# EAGLE board BeagleBone_Black_Rev C EAGLE PCB (EAGLE 7.2.0), part 1 of 5
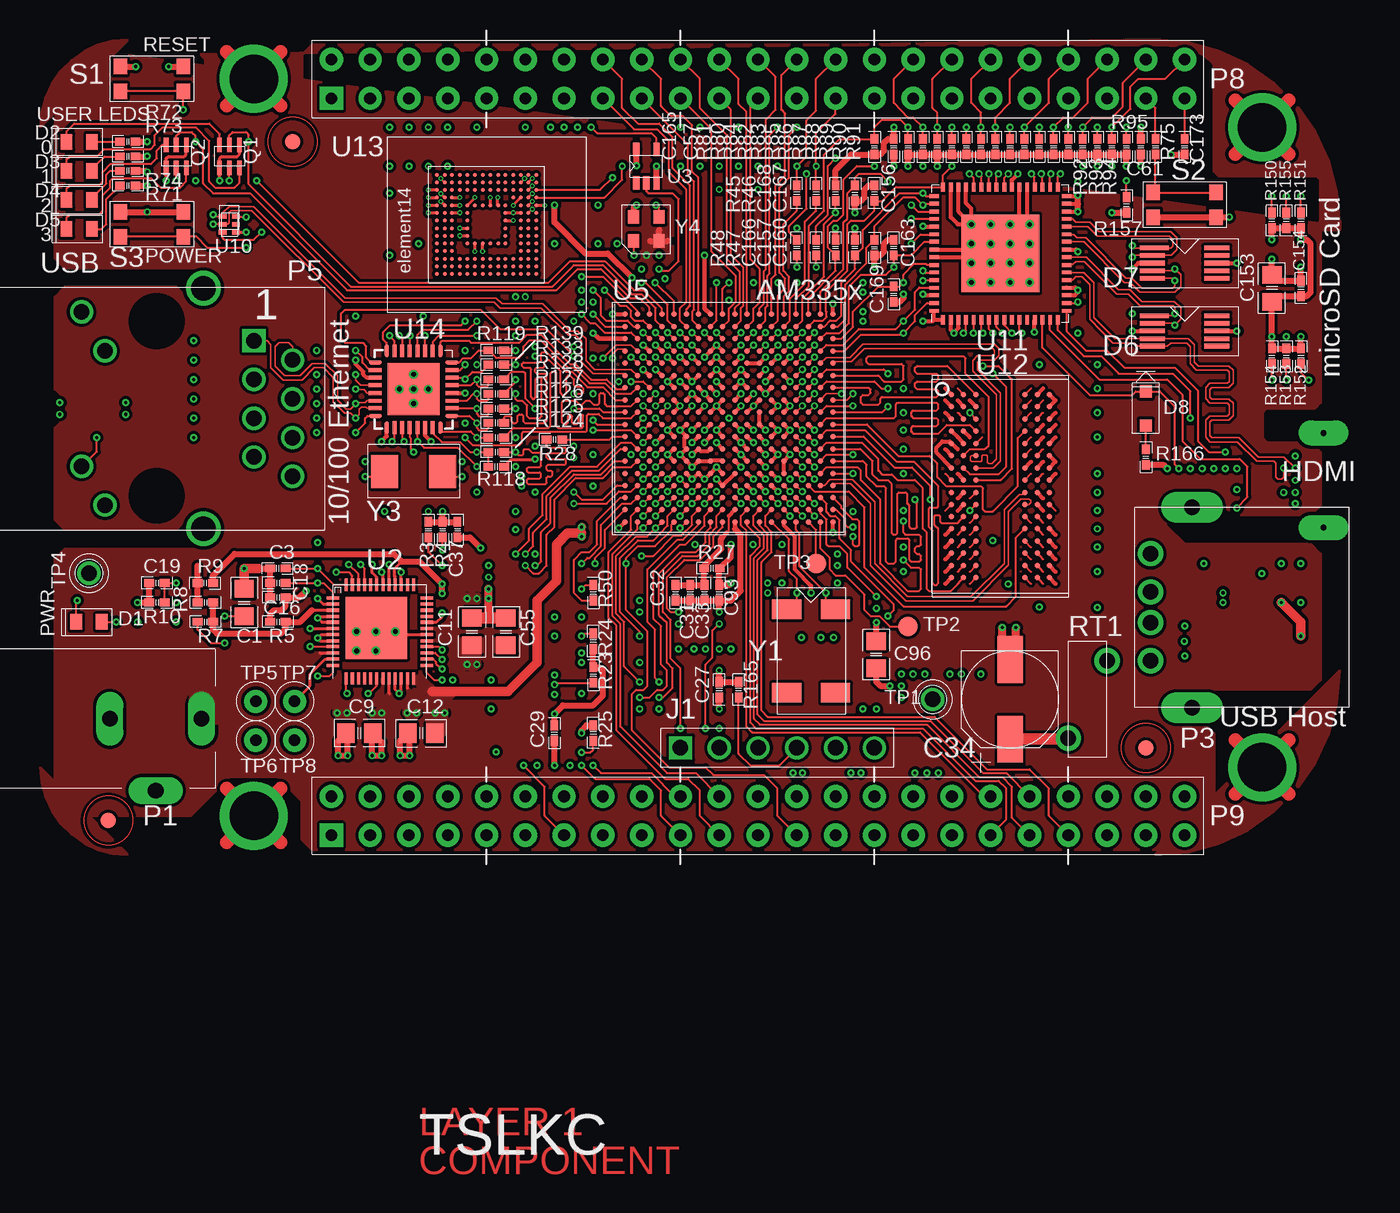
[diagram p0: board, top side]
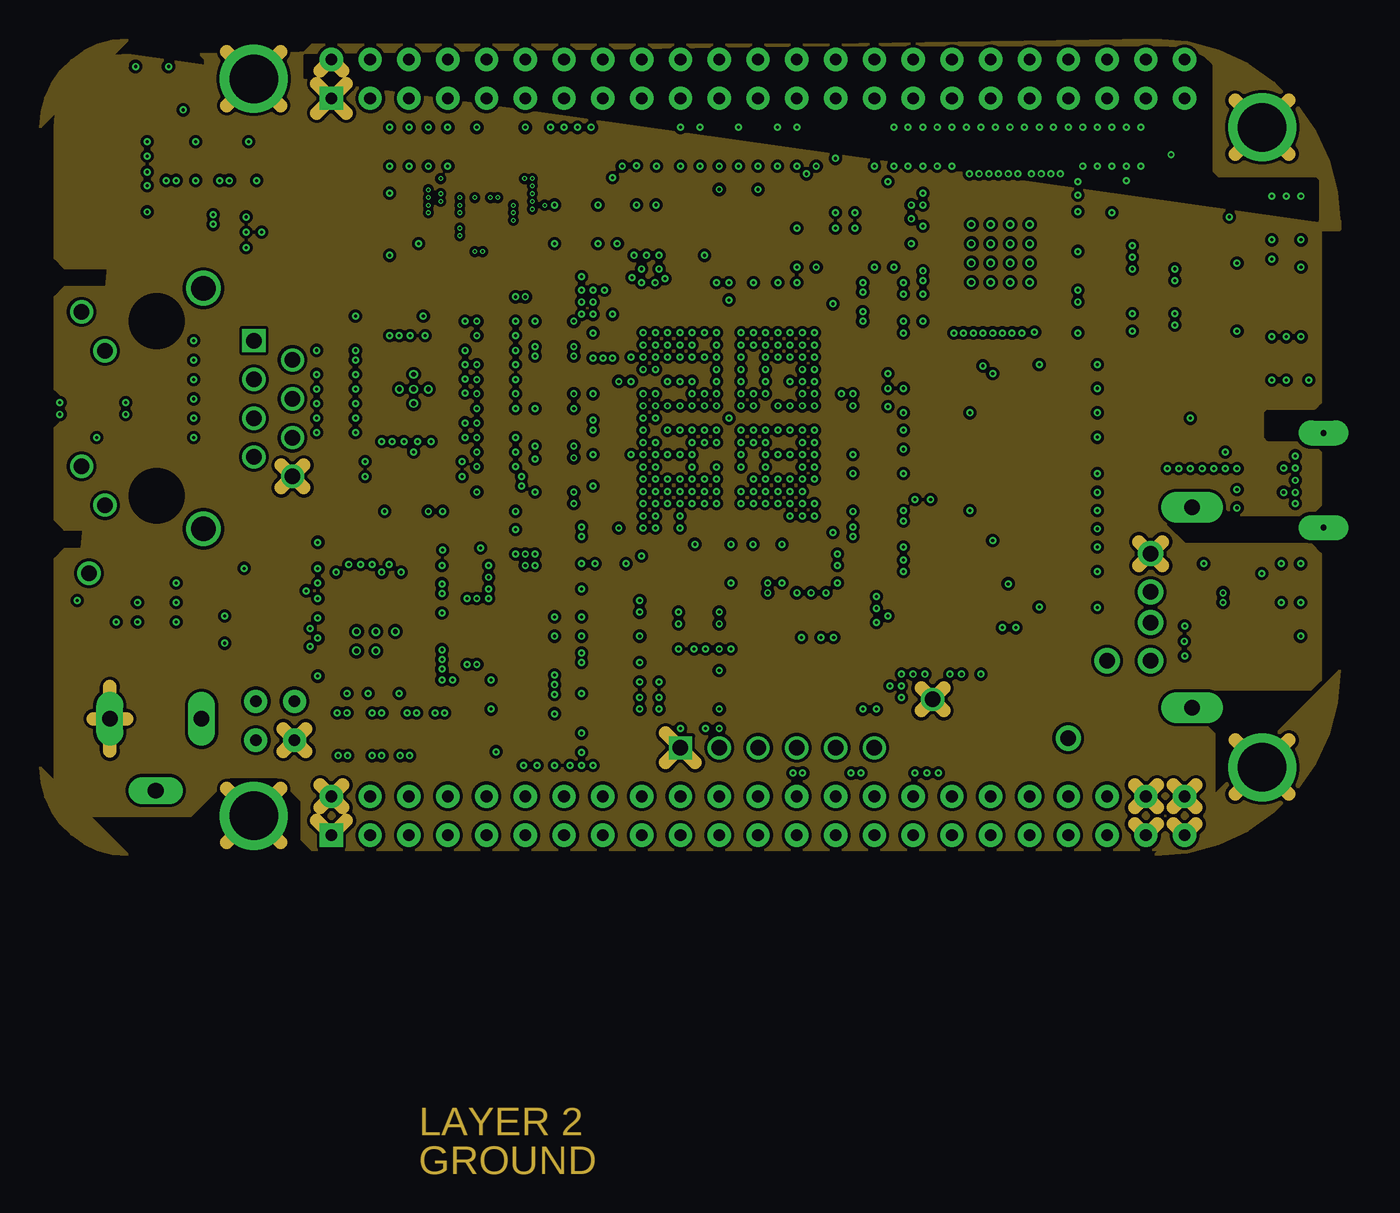
[diagram p1: board, inner layer Route2]
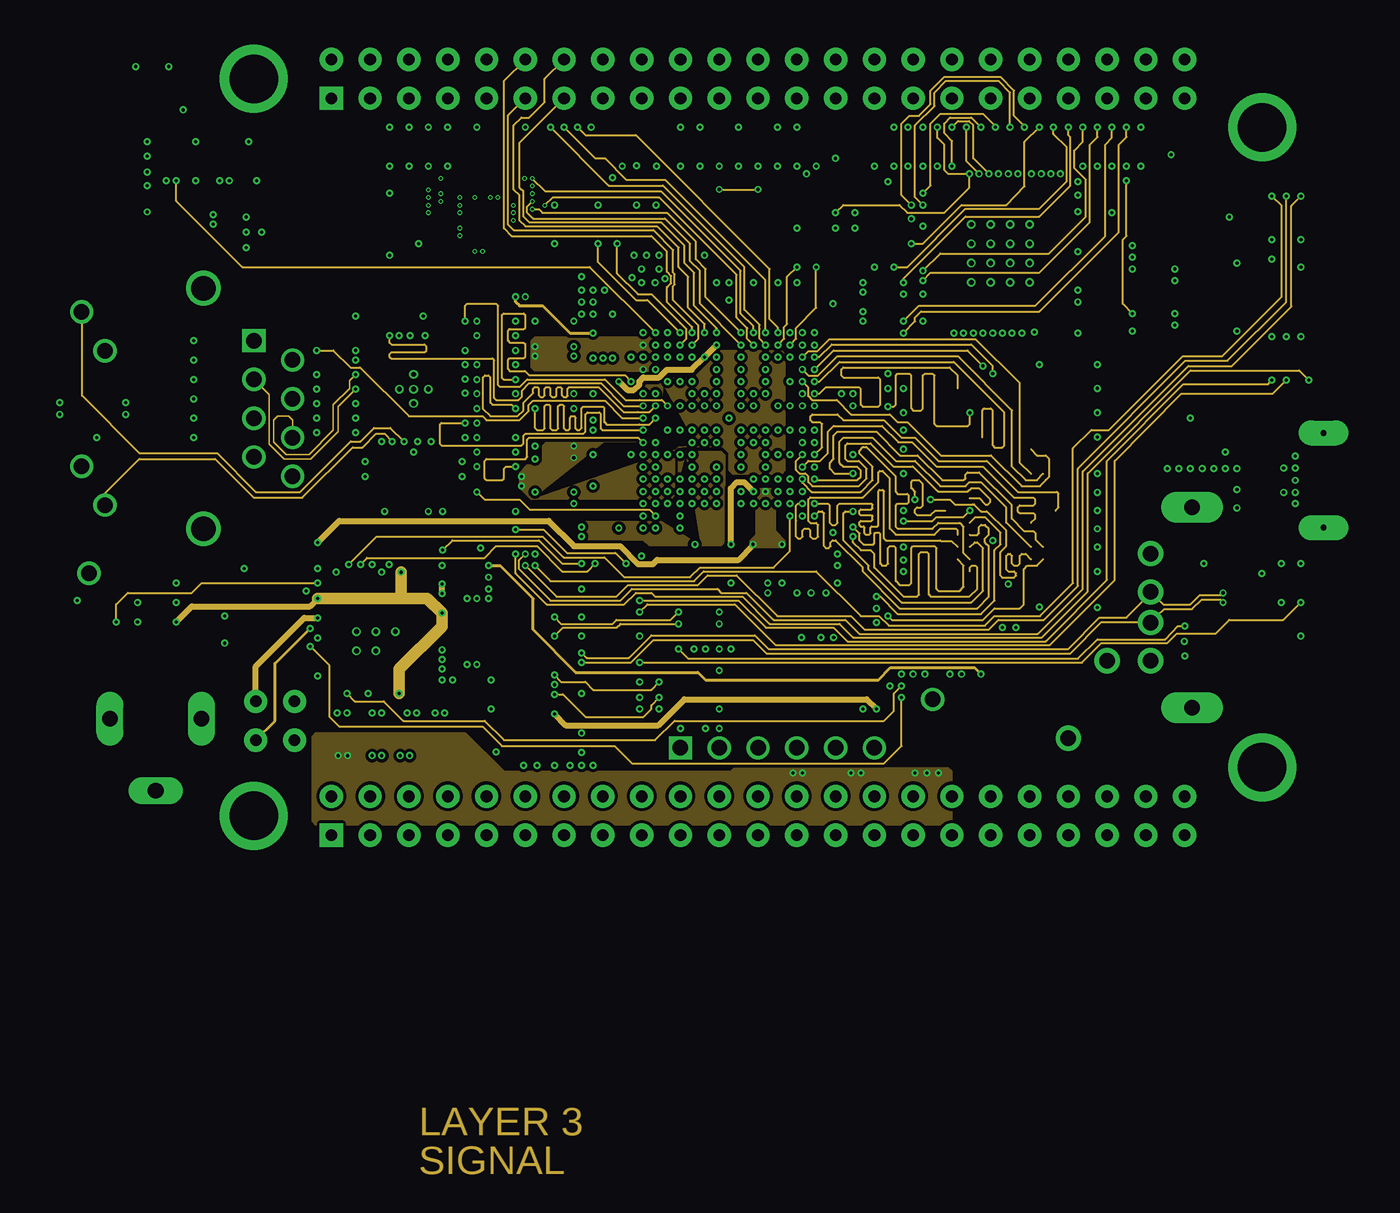
[diagram p2: board, inner layer Route3]
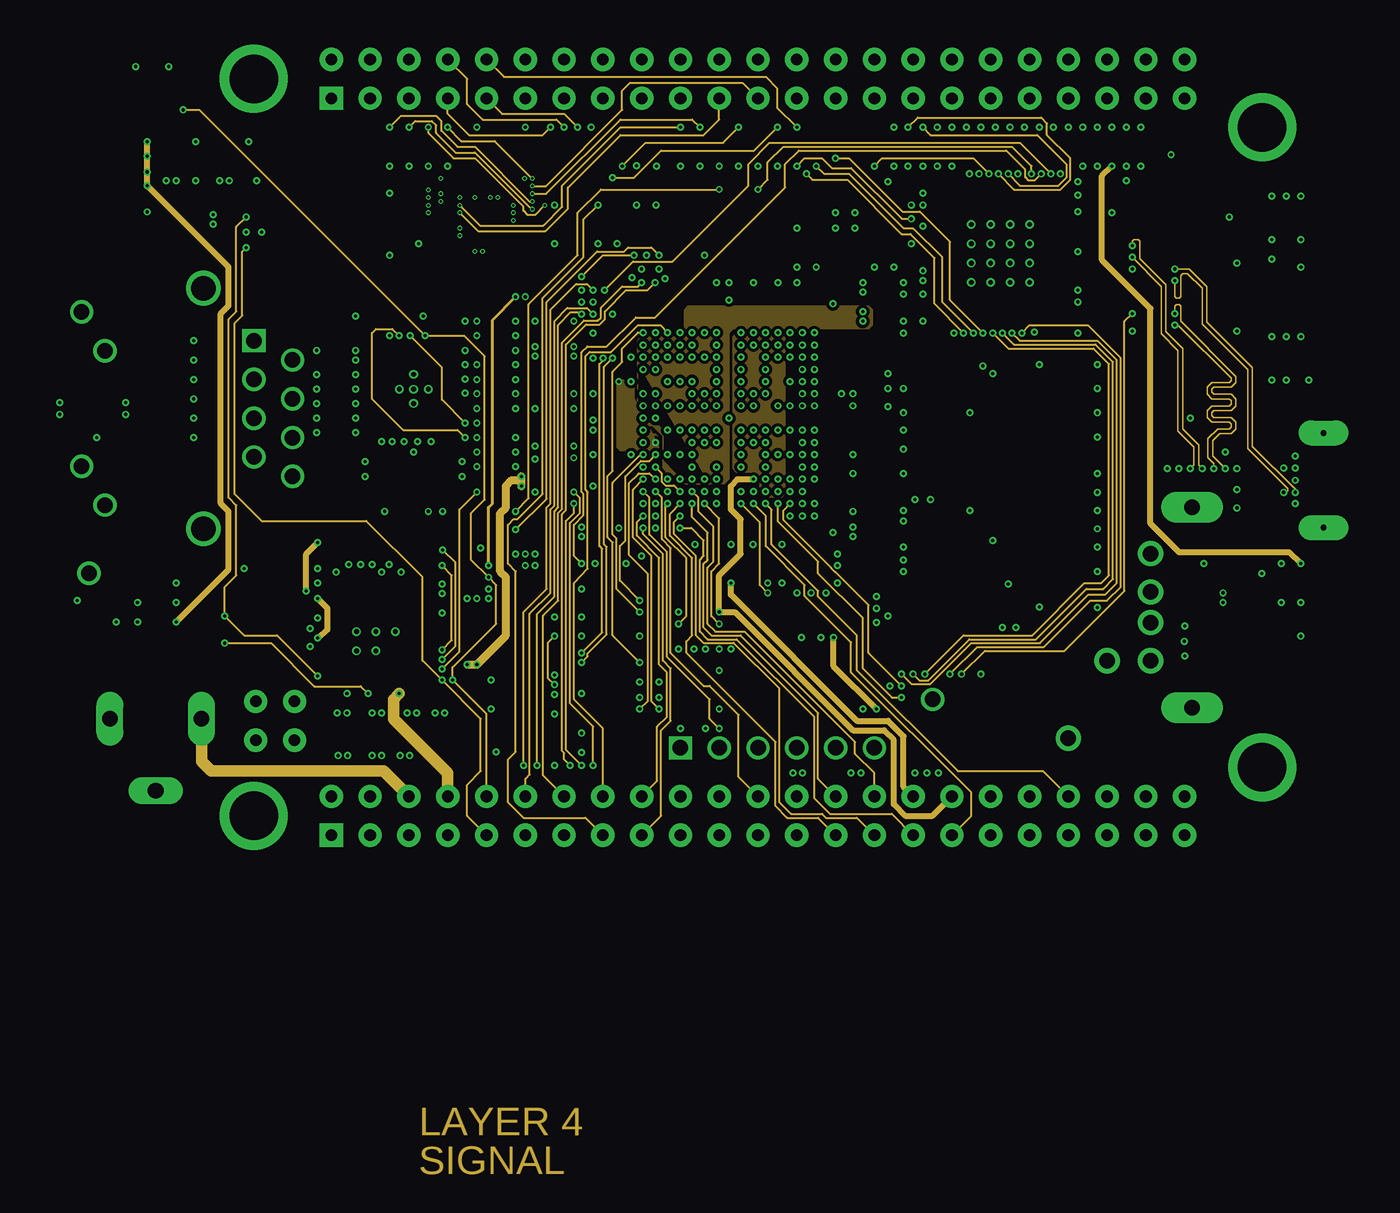
[diagram p3: board, inner layer Route4]
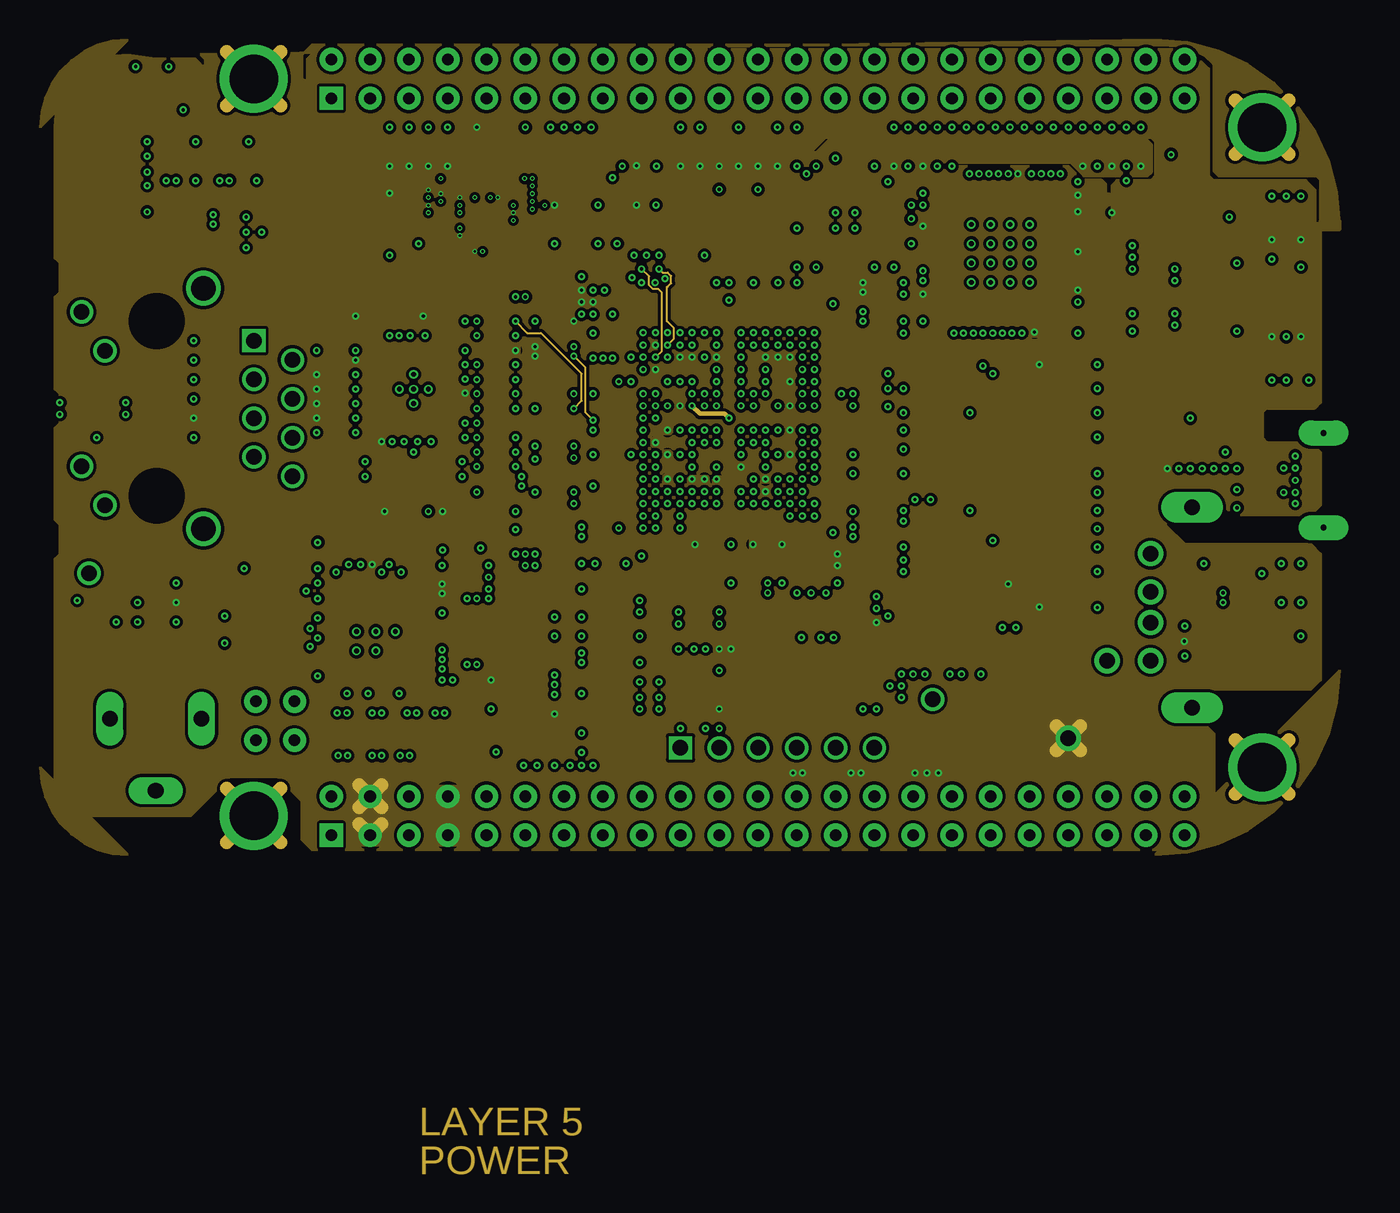
[diagram p4: board, inner layer Route5]
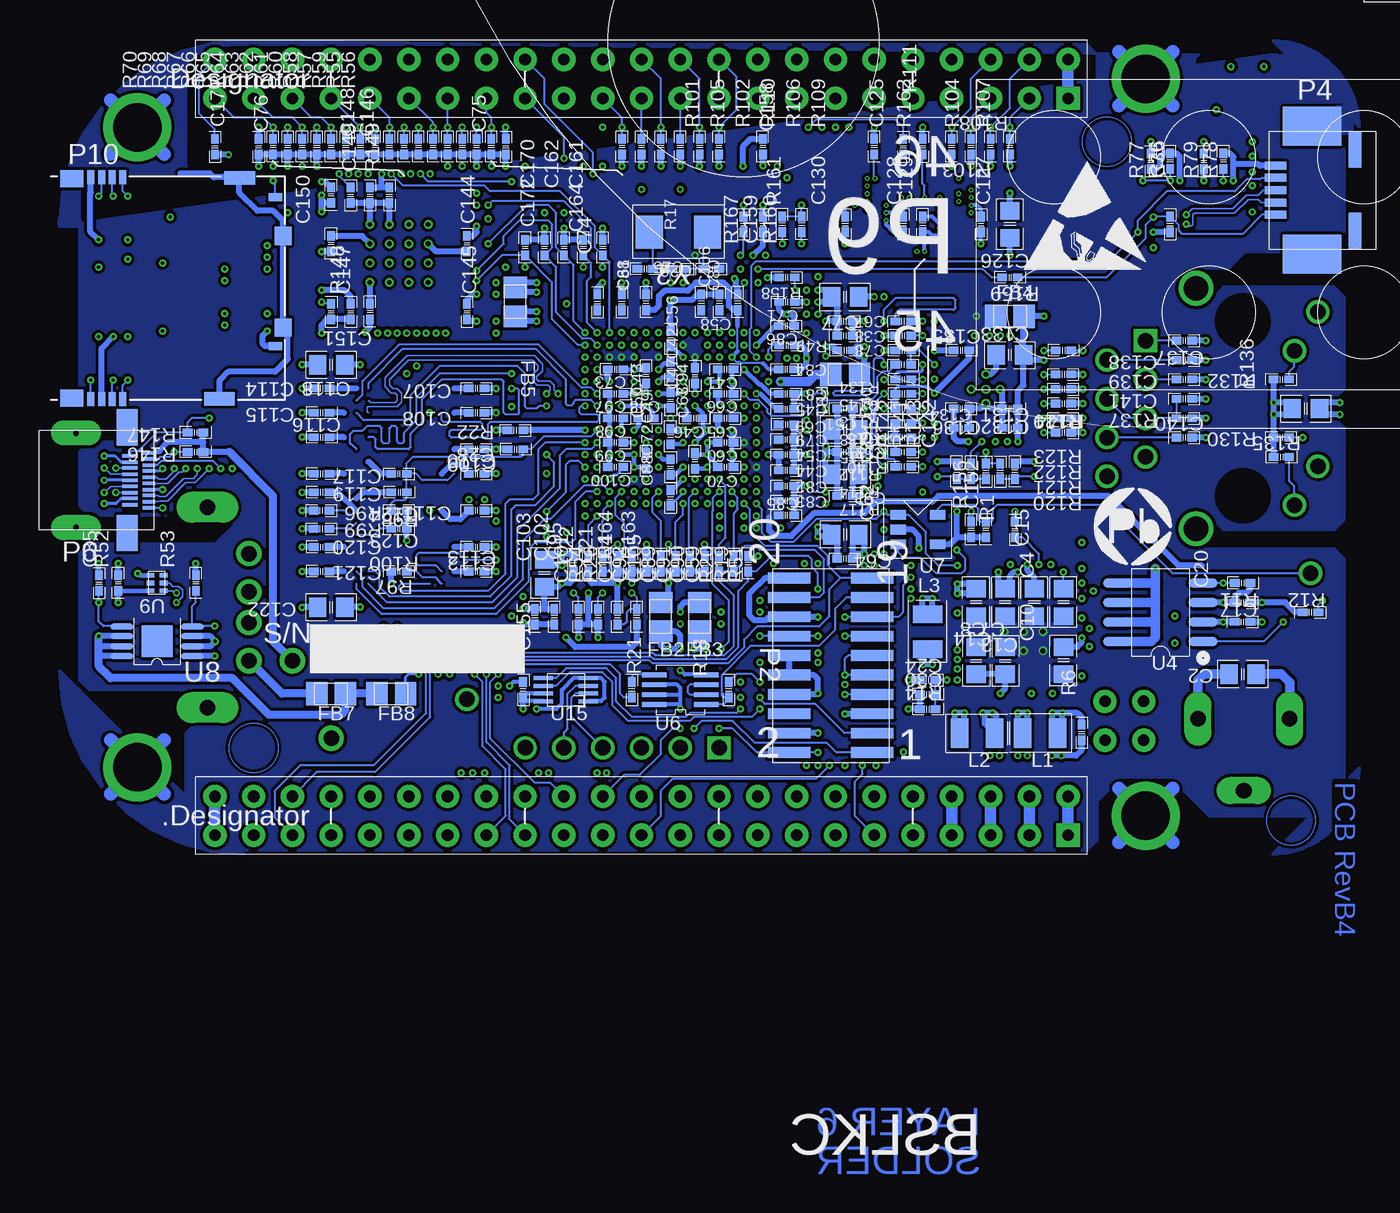
[diagram p5: board, bottom side, seen from below]

No outline drawn. Coordinates in mm, seen from the top.
Copper layers (1*16): Top 0.035mm / dielectric 1.5mm / Bottom 0.035mm
Design rules "BeagleBone_Black_RevB4": minimum track width 10mil, minimum drill 24mil, track to track 8mil, track to pad 8mil, pad to pad 8mil, via to via 8mil, smd to smd 8mil, copper to edge 40mil, drill to drill 8mil, minimum pad ring 0mil, minimum via ring 0mil, stop-mask expansion 4mil, vias tented up to drill 0mil, thermal gap 10mil

## Footprints (pad centres in the part's own frame; a part is rotated, then mirrored left to right if it is on the bottom)
805_1PRIMARY = smd 1.143 x 1.27: 1 -0.889,0; 2 0.889,0
402_2PRIMARY = smd 0.635 x 0.508: 1 -0.508,0; 2 0.508,0
805_2PRIMARY = smd 1.143 x 1.27: 1 -0.889,0; 2 0.889,0
402_1PRIMARY = smd 0.635 x 0.508: 1 -0.508,0; 2 0.508,0
RD205SMD_250D_1PRIMARY = smd 3.048 x 1.651: 1 -2.616,0; 2 2.616,0
LED_0603_1PRIMARY = smd 0.762 x 1.016: 1 -0.838,0; 2 0.838,0
TSSOP10_1PRIMARY = smd 0.305 x 1.905: 1 -0.991,-1.981 | smd 0.305 x 1.651: 2 -0.508,-2.108; 3 0,-2.108; 4 0.508,-2.108; 5 0.991,-2.108; 6 0.991,2.108; 7 0.508,2.108; 8 0,2.108; 9 -0.508,2.108; 10 -0.991,2.108
SOD323_1PRIMARY = smd 0.813 x 0.813: 1 1.118,0; 2 -1.118,0
P:EX40Y40D01 = smd 1.016 x 1.016: 0 0,0
SM-7351-IND-0805_1PRIMARY = smd 1.397 x 1.549: 1 0.94,0; 2 -0.94,0
SIP6_1PRIMARY = drill 1.016 pad 1.524 square: 1 0,6.35 | drill 1.016 pad 1.524: 2 0,3.81; 3 0,1.27; 4 0,-1.27; 5 0,-3.81; 6 0,-6.35
2520_1PRIMARY = smd 1.143 x 1.905: 1 1.143,0; 2 -1.143,0
MTGH200C125D_PL_1PRIMARY = drill 3.175 pad 4.445: 1 -0.406,0
CONN3-PWR-PJ102A_1PRIMARY = drill 1.016 pad 1.778 long: 1 -6.223,0; 2 -0.229,0; 3 -3.226,4.699
HEADER10X2_SMD_1PRIMARY = smd 0.711 x 2.794: 1 5.715,2.718; 2 5.715,-2.718; 3 4.445,2.718; 4 4.445,-2.718; 5 3.175,2.718; 6 3.175,-2.718; 7 1.905,2.718; 8 1.905,-2.718; 9 0.635,2.718; 10 0.635,-2.718; 11 -0.635,2.718; 12 -0.635,-2.718; 13 -1.905,2.718; 14 -1.905,-2.718; 15 -3.175,2.718; 16 -3.175,-2.718; 17 -4.445,2.718; 18 -4.445,-2.718; 19 -5.715,2.718; 20 -5.715,-2.718
USB_A_SH_1PRIMARY = drill 1.016 pad 1.651: 1 -3.48,5.994; 2 -0.991,5.994; 3 1.016,5.994; 4 3.531,5.994 | drill 1.016 pad 2.032 long: 5 -6.553,3.277; 6 6.579,3.277
USB5MINI_4SHIELDED_SMD-5_1PRIMARY = smd 1.397 x 0.508: 1 -2.997,-1.6; 2 -2.997,-0.813; 3 -2.997,0; 4 -2.997,0.813; 5 -2.997,1.6 | smd 3.81 x 2.54: 6 -0.61,-4.191; 7 -0.61,4.191 | smd 0.813 x 2.362: 8 2.21,-2.667; 9 2.21,2.667
RJ45-7499010211A_1PRIMARY = drill 3.251 pad 1.016: 1 5.715,0.076; 16 -5.715,0.076 | drill 1.016 pad 1.524 square: 2 -4.445,6.426 | drill 1.016 pad 1.524: 3 -3.175,8.966; 4 -1.905,6.426; 5 -0.635,8.966; 6 0.635,6.426; 7 1.905,8.966; 8 3.175,6.426; 9 4.445,8.966; 10 -6.325,-4.851; 11 -3.785,-3.327; 12 3.785,-4.851; 13 6.325,-3.327 | drill 1.6 pad 2.286: 14 -7.874,3.124; 15 7.874,3.124
CONN19_HDMI_1PRIMARY = smd 0.229 x 0.838: 1 -1.803,-3.277; 3 -1.397,-3.277; 5 -0.991,-3.277; 7 -0.61,-3.277; 9 -0.203,-3.277; 11 0.203,-3.277; 13 0.61,-3.277; 15 0.991,-3.277; 17 1.397,-3.277; 19 1.803,-3.277 | smd 0.229 x 0.991: 2 -1.6,-2.032; 4 -1.194,-2.032; 6 -0.813,-2.032; 8 -0.406,-2.032; 10 0,-2.032; 12 0.406,-2.032; 14 0.813,-2.032; 16 1.194,-2.032; 18 1.6,-2.032 | drill 0.381 pad 1.651 long: 20 -3.099,1.499; 21 3.099,1.499 | smd 2.388 x 1.372: 22 -3.454,-1.854; 23 3.454,-1.854
HEADER23X2_1PRIMARY = drill 0.762 pad 1.524 square: 1 -27.94,-1.27 | drill 0.762 pad 1.524: 2 -27.94,1.27; 3 -25.4,-1.27; 4 -25.4,1.27; 5 -22.86,-1.27; 6 -22.86,1.27; 7 -20.32,-1.27; 8 -20.32,1.27; 9 -17.78,-1.27; 10 -17.78,1.27; 11 -15.24,-1.27; 12 -15.24,1.27; 13 -12.7,-1.27; 14 -12.7,1.27; 15 -10.16,-1.27; 16 -10.16,1.27; 17 -7.62,-1.27; 18 -7.62,1.27; 19 -5.08,-1.27; 20 -5.08,1.27; 21 -2.54,-1.27; 22 -2.54,1.27; 23 0,-1.27; 24 0,1.27; 25 2.54,-1.27; 26 2.54,1.27; 27 5.08,-1.27; 28 5.08,1.27; 29 7.62,-1.27; 30 7.62,1.27; 31 10.16,-1.27; 32 10.16,1.27; 33 12.7,-1.27; 34 12.7,1.27; 35 15.24,-1.27; 36 15.24,1.27; 37 17.78,-1.27; 38 17.78,1.27; 39 20.32,-1.27; 40 20.32,1.27; 41 22.86,-1.27; 42 22.86,1.27; 43 25.4,-1.27; 44 25.4,1.27; 45 27.94,-1.27; 46 27.94,1.27
SD-MICRO-SCHA5B0300_1PRIMARY = smd 0.914 x 0.457: 1 7.264,3.302; 2 7.264,4.013; 3 7.264,4.699; 4 7.264,5.41; 5 -7.264,5.41; 6 -7.264,4.699; 7 -7.264,4.013; 8 -7.264,3.302 | smd 0.508 x 0.889: 9 -3.785,-6.68; 10 5.969,-6.68 | smd 0.889 x 2.007: 11 7.239,-4.343; 12 -7.239,-3.023 | smd 1.118 x 1.524: 13 7.188,6.655; 14 -7.188,6.655 | smd 1.194 x 1.092: 15 3.429,-7.188; 16 -2.565,-7.188
SMINI6-F3-B_1PRIMARY = smd 0.305 x 0.94: 1 0.66,0.762; 2 0,0.762; 3 -0.66,0.762; 4 -0.66,-0.762; 5 0,-0.762; 6 0.66,-0.762
POLYSW200-5638-310_1PRIMARY = drill 1.016 pad 1.651: 1 -2.54,1.27; 2 2.54,-1.27
SW4SMD_63X161LS_1PRIMARY = smd 0.889 x 1.016: 1 -2.057,-0.813; 2 -2.057,0.813; 3 2.057,-0.813; 4 2.057,0.813
TP1-8040_1PRIMARY = drill 1.016 pad 1.524: 1 0,0
TP60C_SMD_1PRIMARY = smd 1.27 x 1.27: 1 0,0
TP60C33D_1PRIMARY = drill 0.762 pad 1.524: 1 0,0
U_48_RSL_1PRIMARY = smd 0.813 x 0.203: 1 -3.073,2.21; 2 -3.073,1.803; 3 -3.073,1.397; 4 -3.073,0.991; 5 -3.073,0.61; 6 -3.073,0.203; 7 -3.073,-0.203; 8 -3.073,-0.61; 9 -3.073,-0.991; 10 -3.073,-1.397; 11 -3.073,-1.803; 12 -3.073,-2.21; 25 3.073,-2.21; 26 3.073,-1.803; 27 3.073,-1.397; 28 3.073,-0.991; 29 3.073,-0.61; 30 3.073,-0.203; 31 3.073,0.203; 32 3.073,0.61; 33 3.073,0.991; 34 3.073,1.397; 35 3.073,1.803; 36 3.073,2.21 | smd 0.203 x 0.813: 13 -2.21,-3.073; 14 -1.803,-3.073; 15 -1.397,-3.073; 16 -0.991,-3.073; 17 -0.61,-3.073; 18 -0.203,-3.073; 19 0.203,-3.073; 20 0.61,-3.073; 21 0.991,-3.073; 22 1.397,-3.073; 23 1.803,-3.073; 24 2.21,-3.073; 37 2.21,3.073; 38 1.803,3.073; 39 1.397,3.073; 40 0.991,3.073; 41 0.61,3.073; 42 0.203,3.073; 43 -0.203,3.073; 44 -0.61,3.073; 45 -0.991,3.073; 46 -1.397,3.073; 47 -1.803,3.073; 48 -2.21,3.073 | smd 4.039 x 4.039: 49 -0.229,0.229
DCK5_2P15X1P4_1PRIMARY = smd 0.406 x 0.889: 1 -0.66,-1.092; 2 0,-1.092; 3 0.66,-1.092; 4 0.66,1.092; 5 -0.66,1.092
SO8-25X75_1PRIMARY = smd 0.635 x 1.905: 1 1.905,2.794; 2 0.635,2.794; 3 -0.635,2.794; 4 -1.905,2.794; 5 -1.905,-2.794; 6 -0.635,-2.794; 7 0.635,-2.794; 8 1.905,-2.794
AM33XX_15X15_1PRIMARY = smd 0.356 x 0.356: 1 -6.807,6.807; 2 -5.994,6.807; 3 -5.207,6.807; 4 -4.394,6.807; 5 -3.607,6.807; 6 -2.794,6.807; 7 -2.007,6.807; 8 -1.194,6.807; 9 -0.406,6.807; 10 0.406,6.807; 11 1.194,6.807; 12 2.007,6.807; 13 2.794,6.807; 14 3.607,6.807; 15 4.394,6.807; 16 5.207,6.807; 17 5.994,6.807; 18 6.807,6.807; 19 -6.807,5.994; 20 -5.994,5.994; 21 -5.207,5.994; 22 -4.394,5.994; 23 -3.607,5.994; 24 -2.794,5.994; 25 -2.007,5.994; 26 -1.194,5.994; 27 -0.406,5.994; 28 0.406,5.994; 29 1.194,5.994; 30 2.007,5.994; 31 2.794,5.994; 32 3.607,5.994; 33 4.394,5.994; 34 5.207,5.994; 35 5.994,5.994; 36 6.807,5.994; 37 -6.807,5.207; 38 -5.994,5.207; 39 -5.207,5.207; 40 -4.394,5.207; 41 -3.607,5.207; 42 -2.794,5.207; 43 -2.007,5.207; 44 -1.194,5.207; 45 -0.406,5.207; 46 0.406,5.207; 47 1.194,5.207; 48 2.007,5.207; 49 2.794,5.207; 50 3.607,5.207; 51 4.394,5.207; 52 5.207,5.207; 53 5.994,5.207; 54 6.807,5.207; 55 -6.807,4.394; 56 -5.994,4.394; 57 -5.207,4.394; 58 -4.394,4.394; 59 -3.607,4.394; 60 -2.794,4.394; 61 -2.007,4.394; 62 -1.194,4.394; 63 -0.406,4.394; 64 0.406,4.394; 65 1.194,4.394; 66 2.007,4.394; 67 2.794,4.394; 68 3.607,4.394; 69 4.394,4.394; 70 5.207,4.394; 71 5.994,4.394; 72 6.807,4.394; 73 -6.807,3.607; 74 -5.994,3.607; 75 -5.207,3.607; 76 -4.394,3.607; 77 -3.607,3.607; 78 -2.794,3.607; 79 -2.007,3.607; 80 -1.194,3.607; 81 -0.406,3.607; 82 0.406,3.607; 83 1.194,3.607; 84 2.007,3.607; 85 2.794,3.607; 86 3.607,3.607; 87 4.394,3.607; 88 5.207,3.607; 89 5.994,3.607; 90 6.807,3.607; 91 -6.807,2.794; 92 -5.994,2.794; 93 -5.207,2.794; 94 -4.394,2.794; 95 -3.607,2.794; 96 -2.794,2.794; 97 -2.007,2.794; 98 -1.194,2.794; 99 -0.406,2.794; 100 0.406,2.794; 101 1.194,2.794; 102 2.007,2.794; 103 2.794,2.794; 104 3.607,2.794; 105 4.394,2.794; 106 5.207,2.794; 107 5.994,2.794; 108 6.807,2.794; 109 -6.807,2.007; 110 -5.994,2.007; 111 -5.207,2.007; 112 -4.394,2.007; 113 -3.607,2.007; 114 -2.794,2.007; 115 -2.007,2.007; 116 -1.194,2.007; 117 -0.406,2.007; 118 0.406,2.007; 119 1.194,2.007; 120 2.007,2.007; 121 2.794,2.007; 122 3.607,2.007; 123 4.394,2.007; 124 5.207,2.007; 125 5.994,2.007; 126 6.807,2.007; 127 -6.807,1.194; 128 -5.994,1.194; 129 -5.207,1.194; 130 -4.394,1.194; 131 -3.607,1.194; 132 -2.794,1.194; 133 -2.007,1.194; 134 -1.194,1.194; 135 -0.406,1.194; 136 0.406,1.194; 137 1.194,1.194; 138 2.007,1.194; 139 2.794,1.194; 140 3.607,1.194; 141 4.394,1.194; 142 5.207,1.194; 143 5.994,1.194; 144 6.807,1.194; 145 -6.807,0.406; 146 -5.994,0.406; 147 -5.207,0.406; 148 -4.394,0.406; 149 -3.607,0.406; 150 -2.794,0.406; 151 -2.007,0.406; 152 -1.194,0.406; 153 -0.406,0.406; 154 0.406,0.406; 155 1.194,0.406; 156 2.007,0.406; 157 2.794,0.406; 158 3.607,0.406; 159 4.394,0.406; 160 5.207,0.406; 161 5.994,0.406; 162 6.807,0.406; 163 -6.807,-0.406; 164 -5.994,-0.406; 165 -5.207,-0.406; 166 -4.394,-0.406; 167 -3.607,-0.406; 168 -2.794,-0.406; 169 -2.007,-0.406; 170 -1.194,-0.406; 171 -0.406,-0.406; 172 0.406,-0.406; 173 1.194,-0.406; 174 2.007,-0.406; 175 2.794,-0.406; 176 3.607,-0.406; 177 4.394,-0.406; 178 5.207,-0.406; 179 5.994,-0.406; 180 6.807,-0.406; 181 -6.807,-1.194; 182 -5.994,-1.194; 183 -5.207,-1.194; 184 -4.394,-1.194; 185 -3.607,-1.194; 186 -2.794,-1.194; 187 -2.007,-1.194; 188 -1.194,-1.194; 189 -0.406,-1.194; 190 0.406,-1.194; 191 1.194,-1.194; 192 2.007,-1.194; 193 2.794,-1.194; 194 3.607,-1.194; 195 4.394,-1.194; 196 5.207,-1.194; 197 5.994,-1.194; 198 6.807,-1.194; 199 -6.807,-2.007; 200 -5.994,-2.007; 201 -5.207,-2.007; 202 -4.394,-2.007; 203 -3.607,-2.007; 204 -2.794,-2.007; 205 -2.007,-2.007; 206 -1.194,-2.007; 207 -0.406,-2.007; 208 0.406,-2.007; 209 1.194,-2.007; 210 2.007,-2.007; 211 2.794,-2.007; 212 3.607,-2.007; 213 4.394,-2.007; 214 5.207,-2.007; 215 5.994,-2.007; 216 6.807,-2.007; 217 -6.807,-2.794; 218 -5.994,-2.794; 219 -5.207,-2.794; 220 -4.394,-2.794; 221 -3.607,-2.794; 222 -2.794,-2.794; 223 -2.007,-2.794; 224 -1.194,-2.794; 225 -0.406,-2.794; 226 0.406,-2.794; 227 1.194,-2.794; 228 2.007,-2.794; 229 2.794,-2.794; 230 3.607,-2.794; 231 4.394,-2.794; 232 5.207,-2.794; 233 5.994,-2.794; 234 6.807,-2.794; 235 -6.807,-3.607; 236 -5.994,-3.607; 237 -5.207,-3.607; 238 -4.394,-3.607; 239 -3.607,-3.607; 240 -2.794,-3.607; 241 -2.007,-3.607; 242 -1.194,-3.607; 243 -0.406,-3.607; 244 0.406,-3.607; 245 1.194,-3.607; 246 2.007,-3.607; 247 2.794,-3.607; 248 3.607,-3.607; 249 4.394,-3.607; 250 5.207,-3.607; 251 5.994,-3.607; 252 6.807,-3.607; 253 -6.807,-4.394; 254 -5.994,-4.394; 255 -5.207,-4.394; 256 -4.394,-4.394; 257 -3.607,-4.394; 258 -2.794,-4.394; 259 -2.007,-4.394; 260 -1.194,-4.394; 261 -0.406,-4.394; 262 0.406,-4.394; 263 1.194,-4.394; 264 2.007,-4.394; 265 2.794,-4.394; 266 3.607,-4.394; 267 4.394,-4.394; 268 5.207,-4.394; 269 5.994,-4.394; 270 6.807,-4.394; 271 -6.807,-5.207; 272 -5.994,-5.207; 273 -5.207,-5.207; 274 -4.394,-5.207; 275 -3.607,-5.207; 276 -2.794,-5.207; 277 -2.007,-5.207; 278 -1.194,-5.207; 279 -0.406,-5.207; 280 0.406,-5.207; 281 1.194,-5.207; 282 2.007,-5.207; 283 2.794,-5.207; 284 3.607,-5.207; 285 4.394,-5.207; 286 5.207,-5.207; 287 5.994,-5.207; 288 6.807,-5.207; 289 -6.807,-5.994; 290 -5.994,-5.994; 291 -5.207,-5.994; 292 -4.394,-5.994; 293 -3.607,-5.994; 294 -2.794,-5.994; 295 -2.007,-5.994; 296 -1.194,-5.994; 297 -0.406,-5.994; 298 0.406,-5.994; 299 1.194,-5.994; 300 2.007,-5.994; 301 2.794,-5.994; 302 3.607,-5.994; 303 4.394,-5.994; 304 5.207,-5.994; 305 5.994,-5.994; 306 6.807,-5.994; 307 -6.807,-6.807; 308 -5.994,-6.807; 309 -5.207,-6.807; 310 -4.394,-6.807; 311 -3.607,-6.807; 312 -2.794,-6.807; 313 -2.007,-6.807; 314 -1.194,-6.807; 315 -0.406,-6.807; 316 0.406,-6.807; 317 1.194,-6.807; 318 2.007,-6.807; 319 2.794,-6.807; 320 3.607,-6.807; 321 4.394,-6.807; 322 5.207,-6.807; 323 5.994,-6.807; 324 6.807,-6.807
SOP8_DCT_1PRIMARY = smd 0.305 x 1.6: 1 0.965,1.702; 2 0.33,1.702; 3 -0.33,1.702; 4 -0.965,1.702; 5 -0.965,-1.702; 6 -0.33,-1.702; 7 0.33,-1.702; 8 0.965,-1.702
SOT23-5_1PRIMARY = smd 0.635 x 1.016: 1 0.965,1.295; 2 0,1.295; 3 -0.965,1.295; 4 -0.965,-1.295; 5 0.965,-1.295
DGN-16X60_1PRIMARY = smd 0.406 x 1.524: 1 0.965,2.311; 2 0.33,2.311; 3 -0.33,2.311; 4 -0.965,2.311; 5 -0.965,-2.311; 6 -0.33,-2.311; 7 0.33,-2.311; 8 0.965,-2.311 | smd 2.032 x 2.032: 9 0,0
U_6_DRY_1PRIMARY = smd 0.305 x 0.508: 1 -0.508,-0.432; 2 0,-0.432; 3 0.508,-0.432; 4 0.508,0.432; 5 0,0.432; 6 -0.508,0.432
QFN64S9X9P5_1PRIMARY = smd 0.61 x 0.254: 1 -4.343,3.759; 2 -4.343,3.251; 3 -4.343,2.743; 4 -4.343,2.261; 5 -4.343,1.753; 6 -4.343,1.245; 7 -4.343,0.762; 8 -4.343,0.254; 9 -4.343,-0.254; 10 -4.343,-0.762; 11 -4.343,-1.245; 12 -4.343,-1.753; 13 -4.343,-2.261; 14 -4.343,-2.743; 15 -4.343,-3.251; 16 -4.343,-3.759; 33 4.343,-3.759; 34 4.343,-3.251; 35 4.343,-2.743; 36 4.343,-2.261; 37 4.343,-1.753; 38 4.343,-1.245; 39 4.343,-0.762; 40 4.343,-0.254; 41 4.343,0.254; 42 4.343,0.762; 43 4.343,1.245; 44 4.343,1.753; 45 4.343,2.261; 46 4.343,2.743; 47 4.343,3.251; 48 4.343,3.759 | smd 0.254 x 0.61: 17 -3.759,-4.343; 18 -3.251,-4.343; 19 -2.743,-4.343; 20 -2.261,-4.343; 21 -1.753,-4.343; 22 -1.245,-4.343; 23 -0.762,-4.343; 24 -0.254,-4.343; 25 0.254,-4.343; 26 0.762,-4.343; 27 1.245,-4.343; 28 1.753,-4.343; 29 2.261,-4.343; 30 2.743,-4.343; 31 3.251,-4.343; 32 3.759,-4.343; 49 3.759,4.343; 50 3.251,4.343; 51 2.743,4.343; 52 2.261,4.343; 53 1.753,4.343; 54 1.245,4.343; 55 0.762,4.343; 56 0.254,4.343; 57 -0.254,4.343; 58 -0.762,4.343; 59 -1.245,4.343; 60 -1.753,4.343; 61 -2.261,4.343; 62 -2.743,4.343; 63 -3.251,4.343; 64 -3.759,4.343 | smd 5.08 x 5.08: 65 0,0
BGA96_T9_P8_9X14_1PRIMARY = smd 0.356 x 0.356: 1 -3.2,5.994; 2 -2.413,5.994; 3 -1.6,5.994; 4 1.6,5.994; 5 2.413,5.994; 6 3.2,5.994; 7 -3.2,5.207; 8 -2.413,5.207; 9 -1.6,5.207; 10 1.6,5.207; 11 2.413,5.207; 12 3.2,5.207; 13 -3.2,4.394; 14 -2.413,4.394; 15 -1.6,4.394; 16 1.6,4.394; 17 2.413,4.394; 18 3.2,4.394; 19 -3.2,3.607; 20 -2.413,3.607; 21 -1.6,3.607; 22 1.6,3.607; 23 2.413,3.607; 24 3.2,3.607; 25 -3.2,2.794; 26 -2.413,2.794; 27 -1.6,2.794; 28 1.6,2.794; 29 2.413,2.794; 30 3.2,2.794; 31 -3.2,2.007; 32 -2.413,2.007; 33 -1.6,2.007; 34 1.6,2.007; 35 2.413,2.007; 36 3.2,2.007; 37 -3.2,1.194; 38 -2.413,1.194; 39 -1.6,1.194; 40 1.6,1.194; 41 2.413,1.194; 42 3.2,1.194; 43 -3.2,0.406; 44 -2.413,0.406; 45 -1.6,0.406; 46 1.6,0.406; 47 2.413,0.406; 48 3.2,0.406; 49 -3.2,-0.406; 50 -2.413,-0.406; 51 -1.6,-0.406; 52 1.6,-0.406; 53 2.413,-0.406; 54 3.2,-0.406; 55 -3.2,-1.194; 56 -2.413,-1.194; 57 -1.6,-1.194; 58 1.6,-1.194; 59 2.413,-1.194; 60 3.2,-1.194; 61 -3.2,-2.007; 62 -2.413,-2.007; 63 -1.6,-2.007; 64 1.6,-2.007; 65 2.413,-2.007; 66 3.2,-2.007; 67 -3.2,-2.794; 68 -2.413,-2.794; 69 -1.6,-2.794; 70 1.6,-2.794; 71 2.413,-2.794; 72 3.2,-2.794; 73 -3.2,-3.607; 74 -2.413,-3.607; 75 -1.6,-3.607; 76 1.6,-3.607; 77 2.413,-3.607; 78 3.2,-3.607; 79 -3.2,-4.394; 80 -2.413,-4.394; 81 -1.6,-4.394; 82 1.6,-4.394; 83 2.413,-4.394; 84 3.2,-4.394; 85 -3.2,-5.207; 86 -2.413,-5.207; 87 -1.6,-5.207; 88 1.6,-5.207; 89 2.413,-5.207; 90 3.2,-5.207; 91 -3.2,-5.994; 92 -2.413,-5.994; 93 -1.6,-5.994; 94 1.6,-5.994; 95 2.413,-5.994; 96 3.2,-5.994
BGA153_P14_P5_11P5X13_1PRIMARY = smd 0.254 x 0.254: 1 -3.251,3.251; 2 -2.743,3.251; 3 -2.261,3.251; 4 -1.753,3.251; 5 -1.245,3.251; 6 -0.762,3.251; 7 -0.254,3.251; 8 0.254,3.251; 9 0.762,3.251; 10 1.245,3.251; 11 1.753,3.251; 12 2.261,3.251; 13 2.743,3.251; 14 3.251,3.251; 15 -3.251,2.743; 16 -2.743,2.743; 17 -2.261,2.743; 18 -1.753,2.743; 19 -1.245,2.743; 20 -0.762,2.743; 21 -0.254,2.743; 22 0.254,2.743; 23 0.762,2.743; 24 1.245,2.743; 25 1.753,2.743; 26 2.261,2.743; 27 2.743,2.743; 28 3.251,2.743; 29 -3.251,2.261; 30 -2.743,2.261; 31 -2.261,2.261; 32 -1.753,2.261; 33 -1.245,2.261; 34 -0.762,2.261; 35 -0.254,2.261; 36 0.254,2.261; 37 0.762,2.261; 38 1.245,2.261; 39 1.753,2.261; 40 2.261,2.261; 41 2.743,2.261; 42 3.251,2.261; 43 -3.251,1.753; 44 -2.743,1.753; 45 -2.261,1.753; 46 -1.753,1.753; 47 2.261,1.753; 48 2.743,1.753; 49 3.251,1.753; 50 -3.251,1.245; 51 -2.743,1.245; 52 -2.261,1.245; 53 -1.245,1.245; 54 -0.762,1.245; 55 -0.254,1.245; 56 0.254,1.245; 57 0.762,1.245; 58 1.245,1.245; 59 2.261,1.245; 60 2.743,1.245; 61 3.251,1.245; 62 -3.251,0.762; 63 -2.743,0.762; 64 -2.261,0.762; 65 -1.245,0.762; 66 1.245,0.762; 67 2.261,0.762; 68 2.743,0.762; 69 3.251,0.762; 70 -3.251,0.254; 71 -2.743,0.254; 72 -2.261,0.254; 73 -1.245,0.254; 74 1.245,0.254; 75 2.261,0.254; 76 2.743,0.254; 77 3.251,0.254; 78 -3.251,-0.254; 79 -2.743,-0.254; 80 -2.261,-0.254; 81 -1.245,-0.254; 82 1.245,-0.254; 83 2.261,-0.254; 84 2.743,-0.254; 85 3.251,-0.254; 86 -3.251,-0.762; 87 -2.743,-0.762; 88 -2.261,-0.762; 89 -1.245,-0.762; 90 1.245,-0.762; 91 2.261,-0.762; 92 2.743,-0.762; 93 3.251,-0.762; 94 -3.251,-1.245; 95 -2.743,-1.245; 96 -2.261,-1.245; 97 -1.245,-1.245; 98 -0.762,-1.245; 99 -0.254,-1.245; 100 0.254,-1.245; 101 0.762,-1.245; 102 1.245,-1.245; 103 2.261,-1.245; 104 2.743,-1.245; 105 3.251,-1.245; 106 -3.251,-1.753; 107 -2.743,-1.753; 108 -2.261,-1.753; 109 2.261,-1.753; 110 2.743,-1.753; 111 3.251,-1.753; 112 -3.251,-2.261; 113 -2.743,-2.261; 114 -2.261,-2.261; 115 -1.753,-2.261; 116 -1.245,-2.261; 117 -0.762,-2.261; 118 -0.254,-2.261; 119 0.254,-2.261; 120 0.762,-2.261; 121 1.245,-2.261; 122 1.753,-2.261; 123 2.261,-2.261; 124 2.743,-2.261; 125 3.251,-2.261; 126 -3.251,-2.743; 127 -2.743,-2.743; 128 -2.261,-2.743; 129 -1.753,-2.743; 130 -1.245,-2.743; 131 -0.762,-2.743; 132 -0.254,-2.743; 133 0.254,-2.743; 134 0.762,-2.743; 135 1.245,-2.743; 136 1.753,-2.743; 137 2.261,-2.743; 138 2.743,-2.743; 139 3.251,-2.743; 140 -3.251,-3.251; 141 -2.743,-3.251; 142 -2.261,-3.251; 143 -1.753,-3.251; 144 -1.245,-3.251; 145 -0.762,-3.251; 146 -0.254,-3.251; 147 0.254,-3.251; 148 0.762,-3.251; 149 1.245,-3.251; 150 1.753,-3.251; 151 2.261,-3.251; 152 2.743,-3.251; 153 3.251,-3.251
QFN32_5X5MM_EP3P3MM_1PRIMARY = smd 0.254 x 0.838: 1 -1.753,-2.515; 2 -1.245,-2.515; 3 -0.762,-2.515; 4 -0.254,-2.515; 5 0.254,-2.515; 6 0.762,-2.515; 7 1.245,-2.515; 8 1.753,-2.515; 17 1.753,2.515; 18 1.245,2.515; 19 0.762,2.515; 20 0.254,2.515; 21 -0.254,2.515; 22 -0.762,2.515; 23 -1.245,2.515; 24 -1.753,2.515 | smd 0.838 x 0.254: 9 2.515,-1.753; 10 2.515,-1.245; 11 2.515,-0.762; 12 2.515,-0.254; 13 2.515,0.254; 14 2.515,0.762; 15 2.515,1.245; 16 2.515,1.753; 25 -2.515,1.753; 26 -2.515,1.245; 27 -2.515,0.762; 28 -2.515,0.254; 29 -2.515,-0.254; 30 -2.515,-0.762; 31 -2.515,-1.245; 32 -2.515,-1.753 | smd 3.404 x 3.404: 33 0,0
U_8_DCU_1PRIMARY = smd 0.254 x 1.27: 1 0.762,1.473; 2 0.254,1.473; 3 -0.254,1.473; 4 -0.762,1.473; 5 -0.762,-1.473; 6 -0.254,-1.473; 7 0.254,-1.473; 8 0.762,-1.473
XTAL4_126-216SMD_1PRIMARY = smd 1.27 x 1.905: 1 -2.743,-1.6; 2 2.743,-1.6; 3 2.743,1.6; 4 -2.743,1.6
XTAL150SMD_125X196_1PRIMARY = smd 1.778 x 2.159: 1 -1.905,0; 2 1.905,0
OSC4_61X65LS_79X98SMD_1PRIMARY = smd 0.711 x 0.889: 1 -0.838,-0.787; 2 0.838,-0.787; 3 0.838,0.787; 4 -0.838,0.787

## Placement (x,y rotation side)
C1  10uF,_10V  [805_1PRIMARY]  387.86,282.5 270 top
C2  10uF,_10V  [805_1PRIMARY]  382.14,277.8 180 bottom
C3  0.1uf,_6V3  [402_2PRIMARY]  390.07,284.73 0 top
C4  10uF,_10V  [805_2PRIMARY]  393.88,282.5 90 bottom
C5  [DOCFIELD]  753.11,34.29 0 top
C7  10uF,_10V  [805_1PRIMARY]  397.69,278.69 270 bottom
C8  10uF,_10V  [805_1PRIMARY]  399.59,278.69 270 bottom
C9  10uF,_10V  [805_1PRIMARY]  395.4,273.94 180 top
C10  10uF,_10V  [805_2PRIMARY]  393.88,278.69 90 bottom
C11  10uF,_10V  [805_1PRIMARY]  402.77,280.59 270 top
C12  10uF,_10V  [805_1PRIMARY]  399.47,273.94 0 top
C13  10uF,_10V  [805_2PRIMARY]  397.69,282.5 90 bottom
C14  10uF,_10V  [805_2PRIMARY]  399.59,282.5 90 bottom
C15  10uF,_10V  [805_2PRIMARY]  395.78,282.5 90 bottom
C16  2.2uF,_6V3  [402_2PRIMARY]  390.07,282.83 180 top
C17  2.2uF,_6V3  [402_1PRIMARY]  382.14,281.23 0 bottom
C18  2.2uF,_6V3  [402_2PRIMARY]  390.07,283.77 180 top
C19  470pF,_50V  [402_2PRIMARY]  382.14,283.77 180 top
C20  0.1uf,_6V3  [402_1PRIMARY]  382.14,282.5 0 bottom
C21  18pF,_50V  [402_1PRIMARY]  424.36,281.56 90 bottom
C22  18pF,_50V  [402_1PRIMARY]  425.63,281.56 90 bottom
C24  1uF,_10V  [402_1PRIMARY]  402.77,276.48 180 bottom
C25  18pF,_50V  [402_1PRIMARY]  421.26,304.34 180 bottom
C26  18pF,_50V  [402_1PRIMARY]  416.94,304.34 0 bottom
C27  0.1uf,_6V3  [402_2PRIMARY]  418.97,276.78 90 top
C28  0.1uf,_6V3  [402_1PRIMARY]  429.77,292.53 180 bottom
C29  0.1uf,_6V3  [402_2PRIMARY]  408.18,273.94 270 top
C30  0.1uf,_6V3  [402_1PRIMARY]  402.77,275.51 180 bottom
C31  0.1uf,_6V3  [402_2PRIMARY]  417.07,283.13 270 top
C32  1nF,_50V  [402_2PRIMARY]  416.1,283.13 270 top
C33  0.1uf,_6V3  [402_2PRIMARY]  418.01,283.13 270 top
C34  100uF,_6V3  [RD205SMD_250D_1PRIMARY]  438.02,276.15 90 top
C35  0.1uf,_6V3  [402_1PRIMARY]  455.78,283.77 90 bottom
C36  0.1uf,_6V3  [402_2PRIMARY]  386.89,307.26 270 bottom
C37  0.1uf,_6V3  [402_2PRIMARY]  401.83,287.27 270 top
C38  0.1uf,_6V3  [402_1PRIMARY]  408.18,299.97 0 bottom
C39  10uF,_10V  [805_1PRIMARY]  408.18,290.88 180 bottom
C40  10uF,_10V  [805_1PRIMARY]  408.18,293.8 180 bottom
C41  0.1uf,_6V3  [402_1PRIMARY]  416,297.76 0 bottom
C42  0.1uf,_6V3  [402_2PRIMARY]  419.61,297.76 270 bottom
C43  0.1uf,_6V3  [402_1PRIMARY]  421.21,297.36 90 bottom
C44  0.1uf,_6V3  [402_1PRIMARY]  412.01,291.16 0 bottom
C45  0.1uf,_6V3  [402_1PRIMARY]  412.01,295.17 0 bottom
C46  0.1uf,_6V3  [402_1PRIMARY]  418.03,294.56 180 bottom
C47  0.1uf,_6V3  [402_2PRIMARY]  419.61,295.76 270 bottom
C48  0.1uf,_6V3  [402_1PRIMARY]  421.21,294.56 180 bottom
C49  0.1uf,_6V3  [402_1PRIMARY]  419.61,293.37 90 bottom
C50  0.1uf,_6V3  [402_1PRIMARY]  421.21,291.77 90 bottom
C51  0.1uf,_6V3  [402_1PRIMARY]  408.18,295.2 0 bottom
C52  0.1uf,_6V3  [402_1PRIMARY]  408.18,292.35 0 bottom
C53  0.1uf,_6V3  [402_1PRIMARY]  408.18,289.48 0 bottom
C54  0.1uf,_6V3  [402_1PRIMARY]  412.01,292.18 0 bottom
C55  10uF,_10V  [805_1PRIMARY]  405,280.59 270 top
C56  0.1uf,_6V3  [402_2PRIMARY]  419.61,299.77 270 bottom
C57  0.1uf,_6V3  [402_2PRIMARY]  430.4,312.34 270 top
C58  0.1uf,_6V3  [402_1PRIMARY]  416.41,302.16 90 bottom
C59  0.1uf,_6V3  [402_2PRIMARY]  417.37,285.04 270 bottom
C60  0.1uf,_6V3  [402_1PRIMARY]  416,292.96 0 bottom
C61  0.1uf,_6V3  [402_2PRIMARY]  446.58,312.34 270 top
C62  10uF,_10V  [805_1PRIMARY]  408.18,286.94 180 bottom
C63  0.1uf,_6V3  [402_1PRIMARY]  418.01,291.77 90 bottom
C64  0.1uf,_6V3  [402_1PRIMARY]  408.18,285.37 0 bottom
C65  0.1uf,_6V3  [402_1PRIMARY]  416,294.56 0 bottom
C66  0.1uf,_6V3  [402_1PRIMARY]  416,296.16 0 bottom
C67  0.1uf,_6V3  [402_1PRIMARY]  408.18,300.91 0 bottom
C68  0.1uf,_6V3  [402_2PRIMARY]  422.81,302.16 270 bottom
C69  0.1uf,_6V3  [402_1PRIMARY]  412.01,294.16 180 bottom
C70  0.1uf,_6V3  [402_1PRIMARY]  416,291.36 0 bottom
C71  0.1uf,_6V3  [402_1PRIMARY]  411.99,302.18 0 bottom
C72  0.1uf,_6V3  [402_2PRIMARY]  419.61,291.36 270 bottom
C73  0.1uf,_6V3  [402_1PRIMARY]  423.21,297.76 180 bottom
C74  0.1uf,_6V3  [402_2PRIMARY]  424.41,302.16 270 bottom
C75  0.1uf,_6V3  [402_2PRIMARY]  430.4,312.34 270 bottom
C76  0.1uf,_6V3  [402_2PRIMARY]  446.58,312.34 270 bottom
C77  10uF,_10V  [805_2PRIMARY]  408.18,302.51 0 bottom
C78  0.1uf,_6V3  [402_1PRIMARY]  408.18,299.01 180 bottom
C79  0.1uf,_6V3  [402_1PRIMARY]  412.01,293.17 0 bottom
C80  0.1uf,_6V3  [402_1PRIMARY]  415.21,302.16 90 bottom
C81  0.1uf,_6V3  [402_1PRIMARY]  421.21,302.16 90 bottom
C82  0.1uf,_6V3  [402_1PRIMARY]  412.01,290.12 0 bottom
C83  0.1uf,_6V3  [402_1PRIMARY]  412.01,289.15 0 bottom
C84  0.1uf,_6V3  [402_1PRIMARY]  412.01,297.76 0 bottom
C85  0.1uf,_6V3  [402_1PRIMARY]  412.01,288.21 0 bottom
C86  0.1uf,_6V3  [402_1PRIMARY]  412.01,300.61 0 bottom
C87  0.1uf,_6V3  [402_1PRIMARY]  412.01,296.16 0 bottom
C88  0.1uf,_6V3  [402_2PRIMARY]  419.61,289.36 270 bottom
C89  1uF,_10V  [402_2PRIMARY]  420.24,285.04 270 bottom
C90  1uF,_10V  [402_2PRIMARY]  418.34,285.04 270 bottom
C91  1uF,_10V  [402_2PRIMARY]  419.28,285.04 270 bottom
C92  0.1uf,_6V3  [402_2PRIMARY]  422.15,285.04 270 bottom
C93  0.1uf,_6V3  [402_2PRIMARY]  418.97,283.13 270 top
C94  0.1uf,_6V3  [402_2PRIMARY]  418.01,297.36 270 bottom
C95  10uF,_10V  [805_2PRIMARY]  427.86,284.4 90 bottom
C96  10uF,_10V  [805_1PRIMARY]  429.26,279.07 90 top
C97  0.1uf,_6V3  [402_1PRIMARY]  423.21,296.16 0 bottom
C98  0.1uf,_6V3  [402_1PRIMARY]  423.21,294.56 0 bottom
C99  0.1uf,_6V3  [402_1PRIMARY]  423.21,292.96 0 bottom
C100  0.1uf,_6V3  [402_1PRIMARY]  423.21,291.36 0 bottom
C101  0.1uf,_6V3  [402_2PRIMARY]  425.96,285.04 270 bottom
C102  0.1uf,_6V3  [402_1PRIMARY]  427.23,281.56 90 bottom
C103  0.1uf,_6V3  [402_1PRIMARY]  428.5,281.56 90 bottom
C104  1uF,_10V  [402_2PRIMARY]  423.09,285.04 270 bottom
C105  0.1uf,_6V3  [402_2PRIMARY]  421.18,285.04 270 bottom
C106  0.1uf,_6V3  [402_1PRIMARY]  417.6,302.16 90 bottom
C107  0.1uf,_6V3  [402_1PRIMARY]  432.31,296.52 0 bottom
C108  0.1uf,_6V3  [402_1PRIMARY]  432.31,294.92 0 bottom
C109  0.1uf,_6V3  [402_1PRIMARY]  432.31,292.53 0 bottom
C110  0.1uf,_6V3  [402_1PRIMARY]  432.31,290.93 0 bottom
C111  0.1uf,_6V3  [402_1PRIMARY]  432.31,288.52 0 bottom
C112  0.1uf,_6V3  [402_1PRIMARY]  432.31,286.13 0 bottom
C113  0.1uf,_6V3  [402_1PRIMARY]  432.31,284.53 0 bottom
C114  0.1uf,_6V3  [402_1PRIMARY]  442.47,296.52 180 bottom
C115  0.1uf,_6V3  [402_1PRIMARY]  442.47,294.92 180 bottom
C116  0.1uf,_6V3  [402_1PRIMARY]  442.47,293.32 180 bottom
C117  0.1uf,_6V3  [402_1PRIMARY]  442.47,290.93 180 bottom
C118  10uF,_10V  [805_2PRIMARY]  441.83,298.07 0 bottom
C119  0.1uf,_6V3  [402_1PRIMARY]  442.47,289.71 180 bottom
C120  0.1uf,_6V3  [402_1PRIMARY]  442.47,286.13 180 bottom
C121  0.1uf,_6V3  [402_1PRIMARY]  442.47,284.53 180 bottom
C122  10uF,_10V  [805_2PRIMARY]  441.83,282.19 0 bottom
C123  1nF,_50V  [402_1PRIMARY]  437.39,289.71 180 bottom
C124  0.1uf,_6V3  [402_1PRIMARY]  437.39,287.32 0 bottom
C125  2.2uF,_6V3  [402_1PRIMARY]  406.27,312.34 90 bottom
C126  10uF,_10V  [805_2PRIMARY]  397.38,307.26 90 bottom
C127  0.1uf,_6V3  [402_2PRIMARY]  399.29,307.26 270 bottom
C128  0.1uf,_6V3  [402_1PRIMARY]  403.1,307.26 90 bottom
C129  0.1uf,_6V3  [402_2PRIMARY]  404.37,307.26 270 bottom
C130  0.1uf,_6V3  [402_2PRIMARY]  408.18,307.26 270 bottom
C131  0.1uf,_6V3  [402_1PRIMARY]  397.38,293.93 180 bottom
C132  0.1uf,_6V3  [402_1PRIMARY]  397.38,295.2 180 bottom
C133  10uF,_10V  [805_2PRIMARY]  397.38,298.7 0 bottom
C134  1uF,_10V  [402_1PRIMARY]  400.56,293.93 0 bottom
C135  0.1uf,_6V3  [402_1PRIMARY]  400.56,299.01 180 bottom
C136  470pF,_50V  [402_2PRIMARY]  400.56,295.2 0 bottom
C137  15pF,_DNI  [402_1PRIMARY]  385.95,299.64 0 bottom
C138  15pF,_DNI  [402_1PRIMARY]  385.95,298.37 0 bottom
C139  15pF,_DNI  [402_1PRIMARY]  385.95,297.1 0 bottom
C140  15pF,_DNI  [402_1PRIMARY]  385.95,293.29 0 bottom
C141  0.022uF,10V  [402_1PRIMARY]  385.95,295.83 0 bottom
C142  30pF,_50V  [402_1PRIMARY]  397.05,291.08 90 bottom
C143  30pF,_50V  [402_1PRIMARY]  400.86,291.08 90 bottom
C144  2.2uF,_6V3  [402_2PRIMARY]  432.94,305.99 270 bottom
C145  0.1uf,_6V3  [402_2PRIMARY]  432.94,301.55 270 bottom
C146  2.2uF,_6V3  [402_2PRIMARY]  438.02,309.17 270 bottom
C147  0.1uf,_6V3  [402_1PRIMARY]  439.29,301.55 90 bottom
C148  2.2uF,_6V3  [402_2PRIMARY]  439.29,309.17 270 bottom
C149  0.1uf,_6V3  [402_1PRIMARY]  441.83,309.17 90 bottom
C150  0.1uf,_6V3  [402_1PRIMARY]  441.83,305.99 90 bottom
C151  2.2uF,_6V3  [402_2PRIMARY]  440.56,301.55 270 bottom
C152  0.1uf,_6V3  [402_1PRIMARY]  399.92,287.27 90 bottom
C153  10uF,_10V  [805_1PRIMARY]  455.17,303.07 90 top
C154  0.1uf,_6V3  [402_2PRIMARY]  457.07,303.07 90 top
C155  0.1uf,_6V3  [402_2PRIMARY]  429.26,276.78 270 bottom
C156  47pF,_6.3V  [402_2PRIMARY]  429.13,309.3 90 top
C157  47pF,_6.3V  [402_2PRIMARY]  427.86,305.74 90 top
C158  0.1uf,_6V3  [402_1PRIMARY]  413.56,312.34 90 bottom
C159  0.1uf,_6V3  [402_2PRIMARY]  413.56,307.26 270 bottom
C160  47pF,_6.3V  [402_2PRIMARY]  429.13,305.74 270 top
C161  47pF,_6.3V  [402_1PRIMARY]  425.32,305.74 90 bottom
C162  47pF,_6.3V  [402_1PRIMARY]  426.59,305.74 90 bottom
C163  47pF,_6.3V  [402_2PRIMARY]  430.4,305.74 90 top
C164  47pF,_6.3V  [402_1PRIMARY]  424.05,305.74 90 bottom
C165  47pF,_6.3V  [402_2PRIMARY]  429.13,312.34 270 top
C166  47pF,_6.3V  [402_2PRIMARY]  426.59,305.74 90 top
C167  47pF,_6.3V  [402_2PRIMARY]  427.86,309.3 270 top
C168  47pF,_6.3V  [402_2PRIMARY]  426.59,309.3 90 top
C169  47pF,_6.3V  [402_2PRIMARY]  430.4,302.69 270 top
C170  47pF,_6.3V  [402_1PRIMARY]  427.86,305.74 90 bottom
C171  47pF,_6.3V  [402_2PRIMARY]  449.45,312.34 270 bottom
C172  47pF,_6.3V  [402_1PRIMARY]  429.13,305.74 90 bottom
C173  47pF,_6.3V  [402_2PRIMARY]  449.45,312.34 270 top
D1  598-8170-107F  [LED_0603_1PRIMARY]  377.7,281.23 0 top
D2  598-8170-107F  [LED_0603_1PRIMARY]  377.06,312.67 0 top
D3  598-8170-107F  [LED_0603_1PRIMARY]  377.06,310.77 0 top
D4  598-8170-107F  [LED_0603_1PRIMARY]  377.06,308.86 0 top
D5  598-8170-107F  [LED_0603_1PRIMARY]  377.06,306.96 0 top
D6  IP4283CZ10-TT  [TSSOP10_1PRIMARY]  449.45,300.28 270 top
D7  IP4283CZ10-TT  [TSSOP10_1PRIMARY]  449.45,304.72 270 top
D8  RB751V40,115  [SOD323_1PRIMARY]  446.91,295.2 90 top
DUMMY1  [P:EX40Y40D01]  378.97,268.21 0 top
DUMMY2  [P:EX40Y40D01]  446.91,272.98 0 top
DUMMY3  [P:EX40Y40D01]  391.03,312.66 0 top
FB1  150OHM800mA  [SM-7351-IND-0805_1PRIMARY]  408.18,297.43 0 bottom
FB2  150OHM800mA  [SM-7351-IND-0805_1PRIMARY]  420.24,281.56 90 bottom
FB3  150OHM800mA  [SM-7351-IND-0805_1PRIMARY]  417.7,281.56 90 bottom
FB4  150OHM800mA  [SM-7351-IND-0805_1PRIMARY]  397.38,301.24 180 bottom
FB5  150OHM800mA  [SM-7351-IND-0805_1PRIMARY]  429.77,302.18 90 bottom
FB7  150OHM800mA  [SM-7351-IND-0805_1PRIMARY]  441.83,276.53 0 bottom
FB8  0.1_Ohm,_0805  [SM-7351-IND-0805_1PRIMARY]  437.9,276.53 0 bottom
J1  HEADER_6  [SIP6_1PRIMARY]  422.78,272.97 90 top
L1  2.2uH,_2.6A  [2520_1PRIMARY]  395.4,273.94 180 bottom
L2  2.2uH,_2.6A  [2520_1PRIMARY]  399.54,273.94 0 bottom
L3  2.2uH,_2.6A  [2520_1PRIMARY]  402.77,280.59 90 bottom
MTG1  MHOLE  [MTGH200C125D_PL_1PRIMARY]  388.49,268.94 90 top
MTG2  MHOLE  [MTGH200C125D_PL_1PRIMARY]  454.53,272.11 90 top
MTG3  MHOLE  [MTGH200C125D_PL_1PRIMARY]  388.49,317.2 90 top
MTG4  MHOLE  [MTGH200C125D_PL_1PRIMARY]  454.53,314.02 90 top
P1  PJ-200A  [CONN3-PWR-PJ102A_1PRIMARY]  378.84,274.88 180 top
P2  CTI_JTAG,DNI  [HEADER10X2_SMD_1PRIMARY]  409.12,278.38 270 bottom
P3  USB-A_Conn._-_87520-xx1xx  [USB_A_SH_1PRIMARY]  453.21,282.17 90 top
P4  mini_USB-B  [USB5MINI_4SHIELDED_SMD-5_1PRIMARY]  376.99,309.5 0 bottom
P5  WE_7499010211A  [RJ45-7499010211A_1PRIMARY]  382.07,295.2 270 top
P6  10118241-001RLF  [CONN19_HDMI_1PRIMARY]  457.05,290.5 90 bottom
P8  FEMALE_HEADER_2x23  [HEADER23X2_1PRIMARY]  421.51,316.79 0 top
P9  FEMALE_HEADER_2x23  [HEADER23X2_1PRIMARY]  421.51,268.53 0 top
P10  MOLEX_502570-001  [SD-MICRO-SCHA5B0300_1PRIMARY]  452.17,303.07 90 bottom
Q1  DMC56404  [SMINI6-F3-B_1PRIMARY]  386.89,311.71 180 top
Q2  DMC56404  [SMINI6-F3-B_1PRIMARY]  383.41,311.71 180 top
R1  100K,_1%  [402_2PRIMARY]  397.05,287.27 270 bottom
R3  1.5K,_1%  [402_2PRIMARY]  399.92,287.27 270 top
R4  1.5K,_1%  [402_2PRIMARY]  400.86,287.27 270 top
R5  0R,_1%  [402_2PRIMARY]  390.07,281.23 180 top
R6  0R,_1%  [402_2PRIMARY]  392.68,273.99 270 bottom
R7  0R,_1%  [402_2PRIMARY]  385.32,281.23 180 top
R8  0R,_1%  [402_2PRIMARY]  385.32,282.5 180 top
R9  0R,_1%,_DNI  [402_2PRIMARY]  385.32,283.77 0 top
R10  470K,_5%  [402_2PRIMARY]  382.14,282.5 180 top
R11  280K,_1%  [402_1PRIMARY]  382.14,283.77 180 bottom
R12  820,_5%  [402_1PRIMARY]  377.7,281.86 0 bottom
R14  10K,_1%  [402_1PRIMARY]  402.77,277.42 0 bottom
R17  1M,_1%  [402_1PRIMARY]  419.1,304.34 0 bottom
R18  33,_0402  [402_2PRIMARY]  415.8,276.78 270 bottom
R19  0R,_1%  [402_2PRIMARY]  415.47,285.04 270 bottom
R20  0R,_1%  [402_1PRIMARY]  416.43,285.04 90 bottom
R21  33,_0402  [402_2PRIMARY]  422.15,276.78 270 bottom
R22  49.9,_1%  [402_1PRIMARY]  429.77,293.78 0 bottom
R23  4.75K,_1%  [402_2PRIMARY]  410.72,277.75 270 top
R24  4.75K,_1%  [402_2PRIMARY]  410.72,279.96 90 top
R25  4.75K,_1%  [402_2PRIMARY]  410.72,273.94 90 top
R26  4.75K,_1%  [402_1PRIMARY]  424.05,285.04 90 bottom
R27  0R,_1%  [402_2PRIMARY]  418.49,284.73 180 top
R28  33,_0402  [402_2PRIMARY]  408.18,293.17 180 top
R45  33,_0402  [402_2PRIMARY]  424.05,309.3 90 top
R46  33,_0402  [402_2PRIMARY]  425.32,309.3 90 top
R47  33,_0402  [402_2PRIMARY]  425.32,305.74 90 top
R48  33,_0402  [402_2PRIMARY]  424.05,305.74 90 top
R49  0R,_1%  [402_1PRIMARY]  411.99,299.34 180 bottom
R50  0R,_1%  [402_2PRIMARY]  410.72,283.13 270 top
R51  0R,_1%  [402_1PRIMARY]  414.53,285.04 90 bottom
R52  10k,_1%  [402_2PRIMARY]  457.05,283.77 270 bottom
R53  10k,_1%  [402_1PRIMARY]  450.7,283.77 90 bottom
R54  10k,_1%  [402_1PRIMARY]  424.99,285.04 90 bottom
R55  100K,_1%,_DNI  [402_1PRIMARY]  432.31,312.34 90 bottom
R56  100K,_1%  [402_1PRIMARY]  431.34,312.34 90 bottom
R57  100K,_1%,_DNI  [402_1PRIMARY]  434.21,312.34 90 bottom
R58  100K,_1%,DNI  [402_1PRIMARY]  435.15,312.34 90 bottom
R59  100K,_1%,_DNI  [402_1PRIMARY]  433.25,312.34 90 bottom
R60  100K,_1%,DNI  [402_1PRIMARY]  436.12,312.34 90 bottom
R61  100K,_1%,DNI  [402_1PRIMARY]  437.06,312.34 90 bottom
R62  100K,_1%,DNI  [402_1PRIMARY]  438.02,312.34 90 bottom
R63  100K,_1%,DNI  [402_1PRIMARY]  438.96,312.34 90 bottom
R64  100K,_1%,DNI  [402_1PRIMARY]  439.93,312.34 90 bottom
R65  100K,_1%  [402_1PRIMARY]  440.87,312.34 90 bottom
R66  100K,_1%  [402_1PRIMARY]  441.83,312.34 90 bottom
R67  100K,_1%  [402_1PRIMARY]  442.77,312.34 90 bottom
R68  100K,_1%  [402_1PRIMARY]  443.74,312.34 90 bottom
R69  100K,_1%,_DNI  [402_1PRIMARY]  444.68,312.34 90 bottom
R70  100K,_1%,DNI  [402_1PRIMARY]  445.64,312.34 90 bottom
R71  820,_5%  [402_2PRIMARY]  380.24,309.8 180 top
R72  820,_5%  [402_2PRIMARY]  380.24,312.67 180 top
R73  820,_5%  [402_2PRIMARY]  380.24,311.71 180 top
R74  820,_5%  [402_2PRIMARY]  380.24,310.77 180 top
R75  100  [402_2PRIMARY]  447.55,312.34 270 top
R76  100K,_1%  [402_1PRIMARY]  386.89,311.4 90 bottom
R77  100K,_1%  [402_2PRIMARY]  388.16,311.4 270 bottom
R78  100K,_1%  [402_1PRIMARY]  383.41,311.4 90 bottom
R79  100K,_1%  [402_2PRIMARY]  384.68,311.4 270 bottom
R80  100K,_1%  [402_2PRIMARY]  432.31,312.34 270 top
R81  100K,_1%,_DNI  [402_2PRIMARY]  431.34,312.34 270 top
R82  100K,_1%  [402_2PRIMARY]  434.21,312.34 270 top
R83  100K,_1%  [402_2PRIMARY]  435.15,312.34 270 top
R84  100K,_1%  [402_2PRIMARY]  433.25,312.34 270 top
R85  100K,_1%  [402_2PRIMARY]  436.12,312.34 270 top
R86  100K,_1%  [402_2PRIMARY]  437.06,312.34 270 top
R87  100K,_1%  [402_2PRIMARY]  438.02,312.34 270 top
R88  100K,_1%  [402_2PRIMARY]  438.96,312.34 270 top
R89  100K,_1%  [402_2PRIMARY]  439.93,312.34 270 top
R90  100K,_1%,_DNI  [402_2PRIMARY]  440.87,312.34 270 top
R91  100K,_1%,_DNI  [402_2PRIMARY]  441.83,312.34 270 top
R92  100K,_1%,_DNI  [402_2PRIMARY]  442.77,312.34 270 top
R93  100K,_1%,_DNI  [402_2PRIMARY]  443.74,312.34 270 top
R94  100K,_1%  [402_2PRIMARY]  444.68,312.34 270 top
R95  100K,_1%  [402_2PRIMARY]  445.64,312.34 270 top
R96  10k,_1%  [402_1PRIMARY]  442.47,288.52 0 bottom
R97  1.5K,_1%  [402_1PRIMARY]  437.39,284.53 0 bottom
R98  10k,_1%  [402_1PRIMARY]  437.39,290.93 0 bottom
R99  240,_1%  [402_2PRIMARY]  442.47,287.32 0 bottom
R100  10k,_1%  [402_1PRIMARY]  437.39,288.52 0 bottom
R101  10k,_1%  [402_1PRIMARY]  422.78,312.34 90 bottom
R102  10k,_1%  [402_1PRIMARY]  420.24,312.34 90 bottom
R103  10k,_1%  [402_1PRIMARY]  399.92,312.34 90 bottom
R104  10k,_1%  [402_1PRIMARY]  401.19,312.34 90 bottom
R105  10k,_1%  [402_1PRIMARY]  421.51,312.34 90 bottom
R106  10k,_1%  [402_1PRIMARY]  417.7,312.34 90 bottom
R107  10k,_1%  [402_1PRIMARY]  397.38,312.34 90 bottom
R108  10k,_1%  [402_1PRIMARY]  398.65,312.34 90 bottom
R109  10k,_1%  [402_1PRIMARY]  416.43,312.34 90 bottom
R110  10k,_1%  [402_1PRIMARY]  418.97,312.34 90 bottom
R111  10k,_1%  [402_2PRIMARY]  403.1,312.34 270 bottom
R112  1.5K,_1%  [402_1PRIMARY]  404.37,296.16 180 bottom
R113  1.5K,_1%  [402_1PRIMARY]  404.37,299.01 180 bottom
R114  1.5K,_1%  [402_1PRIMARY]  404.37,295.2 180 bottom
R115  10k,_1%  [402_1PRIMARY]  404.37,297.1 180 bottom
R116  10k,_1%  [402_1PRIMARY]  404.37,293.29 180 bottom
R117  10k,_1%  [402_1PRIMARY]  404.37,294.26 180 bottom
R118  10k,_1%  [402_2PRIMARY]  404.37,291.39 0 top
R119  1.5K,_1%  [402_2PRIMARY]  404.37,299.01 180 top
R120  49.9,_1%  [402_1PRIMARY]  393.88,294.56 0 bottom
R121  49.9,_1%  [402_1PRIMARY]  393.88,295.53 0 bottom
R122  49.9,_1%  [402_1PRIMARY]  393.88,296.47 0 bottom
R123  49.9,_1%  [402_1PRIMARY]  393.88,297.43 0 bottom
R124  10,_1%,DNI  [402_2PRIMARY]  404.37,292.35 180 top
R125  100,_1%  [402_2PRIMARY]  404.37,293.29 180 top
R126  100,_1%  [402_2PRIMARY]  404.37,294.26 180 top
R127  100,_1%  [402_2PRIMARY]  404.37,295.2 180 top
R128  100,_1%  [402_2PRIMARY]  404.37,296.16 180 top
R129  100,_1%  [402_1PRIMARY]  393.88,299.01 180 bottom
R130  470,_5%  [402_1PRIMARY]  379.6,293.29 0 bottom
R131  100,_1%  [402_1PRIMARY]  404.37,292.35 0 bottom
R132  470,_5%  [402_1PRIMARY]  379.6,297.1 0 bottom
R133  100,_1%  [402_2PRIMARY]  404.37,297.1 180 top
R134  100,_1%  [402_1PRIMARY]  404.37,300.91 0 bottom
R135  10k,_1%  [402_1PRIMARY]  379.6,292.02 180 bottom
R136  0.1,_0805  [805_2PRIMARY]  378,295.2 0 bottom
R137  0R,_1%  [402_1PRIMARY]  385.95,294.56 0 bottom
R138  100,_1%  [402_1PRIMARY]  404.37,298.07 0 bottom
R139  100,_1%  [402_2PRIMARY]  404.37,298.07 180 top
R140  0R,_1%,DNI  [402_1PRIMARY]  404.37,291.39 0 bottom
R141  1M,_1%,DNI  [402_2PRIMARY]  398.96,291.08 270 bottom
R142  0R,_1%  [402_1PRIMARY]  399.92,291.08 90 bottom
R143  10,_1%  [402_2PRIMARY]  398.02,291.08 270 bottom
R144  12.1K,_1%  [402_1PRIMARY]  393.88,293.62 0 bottom
R145  10k,_1%  [402_1PRIMARY]  404.37,299.97 180 bottom
R146  1.5K,_1%  [402_1PRIMARY]  450.72,292.35 180 bottom
R147  1.5K,_1%  [402_1PRIMARY]  450.72,293.62 180 bottom
R148  10k,_1%  [402_2PRIMARY]  441.83,301.55 270 bottom
R149  0R,_1%  [402_2PRIMARY]  440.56,309.17 270 bottom
R150  10k,_1%  [402_2PRIMARY]  455.17,307.52 90 top
R151  10k,_1%  [402_2PRIMARY]  457.07,307.52 90 top
R152  10k,_1%  [402_2PRIMARY]  457.07,298.63 270 top
R153  10k,_1%  [402_2PRIMARY]  456.11,298.63 270 top
R154  10k,_1%  [402_2PRIMARY]  455.17,298.63 270 top
R155  10k,_1%  [402_2PRIMARY]  456.11,307.52 90 top
R156  10k,_1%  [402_1PRIMARY]  398.96,287.27 90 bottom
R157  10k,_1%  [402_2PRIMARY]  445.64,308.53 270 top
R158  10k,_1%  [402_1PRIMARY]  411.99,303.78 0 bottom
R159  0R,_1%  [402_1PRIMARY]  397.38,303.78 180 bottom
R160  0R,_1%  [402_1PRIMARY]  412.29,307.26 90 bottom
R161  0R,_1%  [402_1PRIMARY]  411.02,307.26 90 bottom
R162  0R,_1%  [402_2PRIMARY]  404.37,312.34 270 bottom
R163  4.75K,_1%  [402_1PRIMARY]  421.82,281.56 90 bottom
R164  4.75K,_1%  [402_1PRIMARY]  423.09,281.56 90 bottom
R165  100K,_1%  [402_2PRIMARY]  420.24,276.78 90 top
R166  27K,_1%  [402_2PRIMARY]  446.91,292.02 270 top
R167  33,_0402  [402_2PRIMARY]  414.83,307.26 270 bottom
RT1  PTC_RXEF010  [POLYSW200-5638-310_1PRIMARY]  443.1,276.15 90 top
S1  KMR231GLFS  [SW4SMD_63X161LS_1PRIMARY]  381.81,316.79 180 top
S2  KMR231GLFS  [SW4SMD_63X161LS_1PRIMARY]  449.45,308.53 180 top
S3  KMR231GLFS  [SW4SMD_63X161LS_1PRIMARY]  381.81,307.26 180 top
TP1  TESTPT1  [TP1-8040_1PRIMARY]  432.94,276.15 0 top
TP2  TESTPT1  [TP60C_SMD_1PRIMARY]  431.34,280.92 0 top
TP3  TESTPT1  [TP60C_SMD_1PRIMARY]  425.32,285.04 0 top
TP4  TESTPT1  [TP1-8040_1PRIMARY]  377.7,284.4 0 top
TP5  TESTPT1  [TP60C33D_1PRIMARY]  388.62,276.02 0 top
TP6  TESTPT1  [TP60C33D_1PRIMARY]  388.62,273.48 0 top
TP7  TESTPT1  [TP60C33D_1PRIMARY]  391.16,276.02 0 top
TP8  TESTPT1  [TP60C33D_1PRIMARY]  391.16,273.48 0 top
U2  TPS65217C  [U_48_RSL_1PRIMARY]  396.75,280.59 0 top
U3  SN74LVC1G06DCK  [DCK5_2P15X1P4_1PRIMARY]  414.2,311.07 0 top
U4  TL5209  [SO8-25X75_1PRIMARY]  387.53,281.86 270 bottom
U5  IC_AM335X_ZCE_1  [AM33XX_15X15_1PRIMARY]  419.61,294.56 180 top
U6  SN74LVC1G74DCTR  [SOP8_DCT_1PRIMARY]  418.97,276.78 270 bottom
U7  24LC32A  [SOT23-5_1PRIMARY]  403.4,287.27 90 bottom
U8  TPS2051__DGN_  [DGN-16X60_1PRIMARY]  453.24,279.96 270 bottom
U9  TPD4S012  [U_6_DRY_1PRIMARY]  453.24,283.77 90 bottom
U10  TPD4S012  [U_6_DRY_1PRIMARY]  386.89,307.26 270 top
U11  TDA19988  [QFN64S9X9P5_1PRIMARY]  437.39,305.36 0 top
U12  MT41K256M16HA_-125:E  [BGA96_T9_P8_9X14_1PRIMARY]  437.39,290.12 0 top
U13  eMMC,_2GB  [BGA153_P14_P5_11P5X13_1PRIMARY]  403.73,307.26 270 top
U14  LAN8710A  [QFN32_5X5MM_EP3P3MM_1PRIMARY]  398.96,296.47 0 top
U15  SN74LVC2G241  [U_8_DCU_1PRIMARY]  426.47,276.78 270 bottom
Y1  32.768kHz  [XTAL4_126-216SMD_1PRIMARY]  424.99,279.32 270 top
Y2  24MHz  [XTAL150SMD_125X196_1PRIMARY]  419.1,306.76 180 bottom
Y3  25.000MHz  [XTAL150SMD_125X196_1PRIMARY]  398.96,291.08 180 top
Y4  24.576MHz  [OSC4_61X65LS_79X98SMD_1PRIMARY]  414.2,306.96 0 top

## Library data of the parts
C1-C4 C7-C22 C24-C173 D1-D8 DUMMY1-DUMMY3 FB1-FB5 FB7 FB8 J1 L1-L3 MTG1-MTG4 P1-P6 P8-P10 Q1 Q2 R1 R3-R12 R14 R17-R28 R45-R167 RT1 S1-S3 TP1-TP8 U2-U15 Y1-Y4 = BeagleBone_Black_RevB4
C5 = frames